# Altium PCB imx6_base_board_lcd7_r1.PcbDoc (part 5 of 6)
Units mil, origin at the board's own origin, x right, y up, seen from the top; angles counter-clockwise.
Board outline 7480.32 x 5118.11 mil, 4 copper layers (Top Layer, Internal Plane 1, Internal Plane 2, Bottom Layer), stack 30.635 mil thick; 518 components, 398 nets, 1886 pads, 1407 vias.
Unrouted connection lines stored in the file: 12.
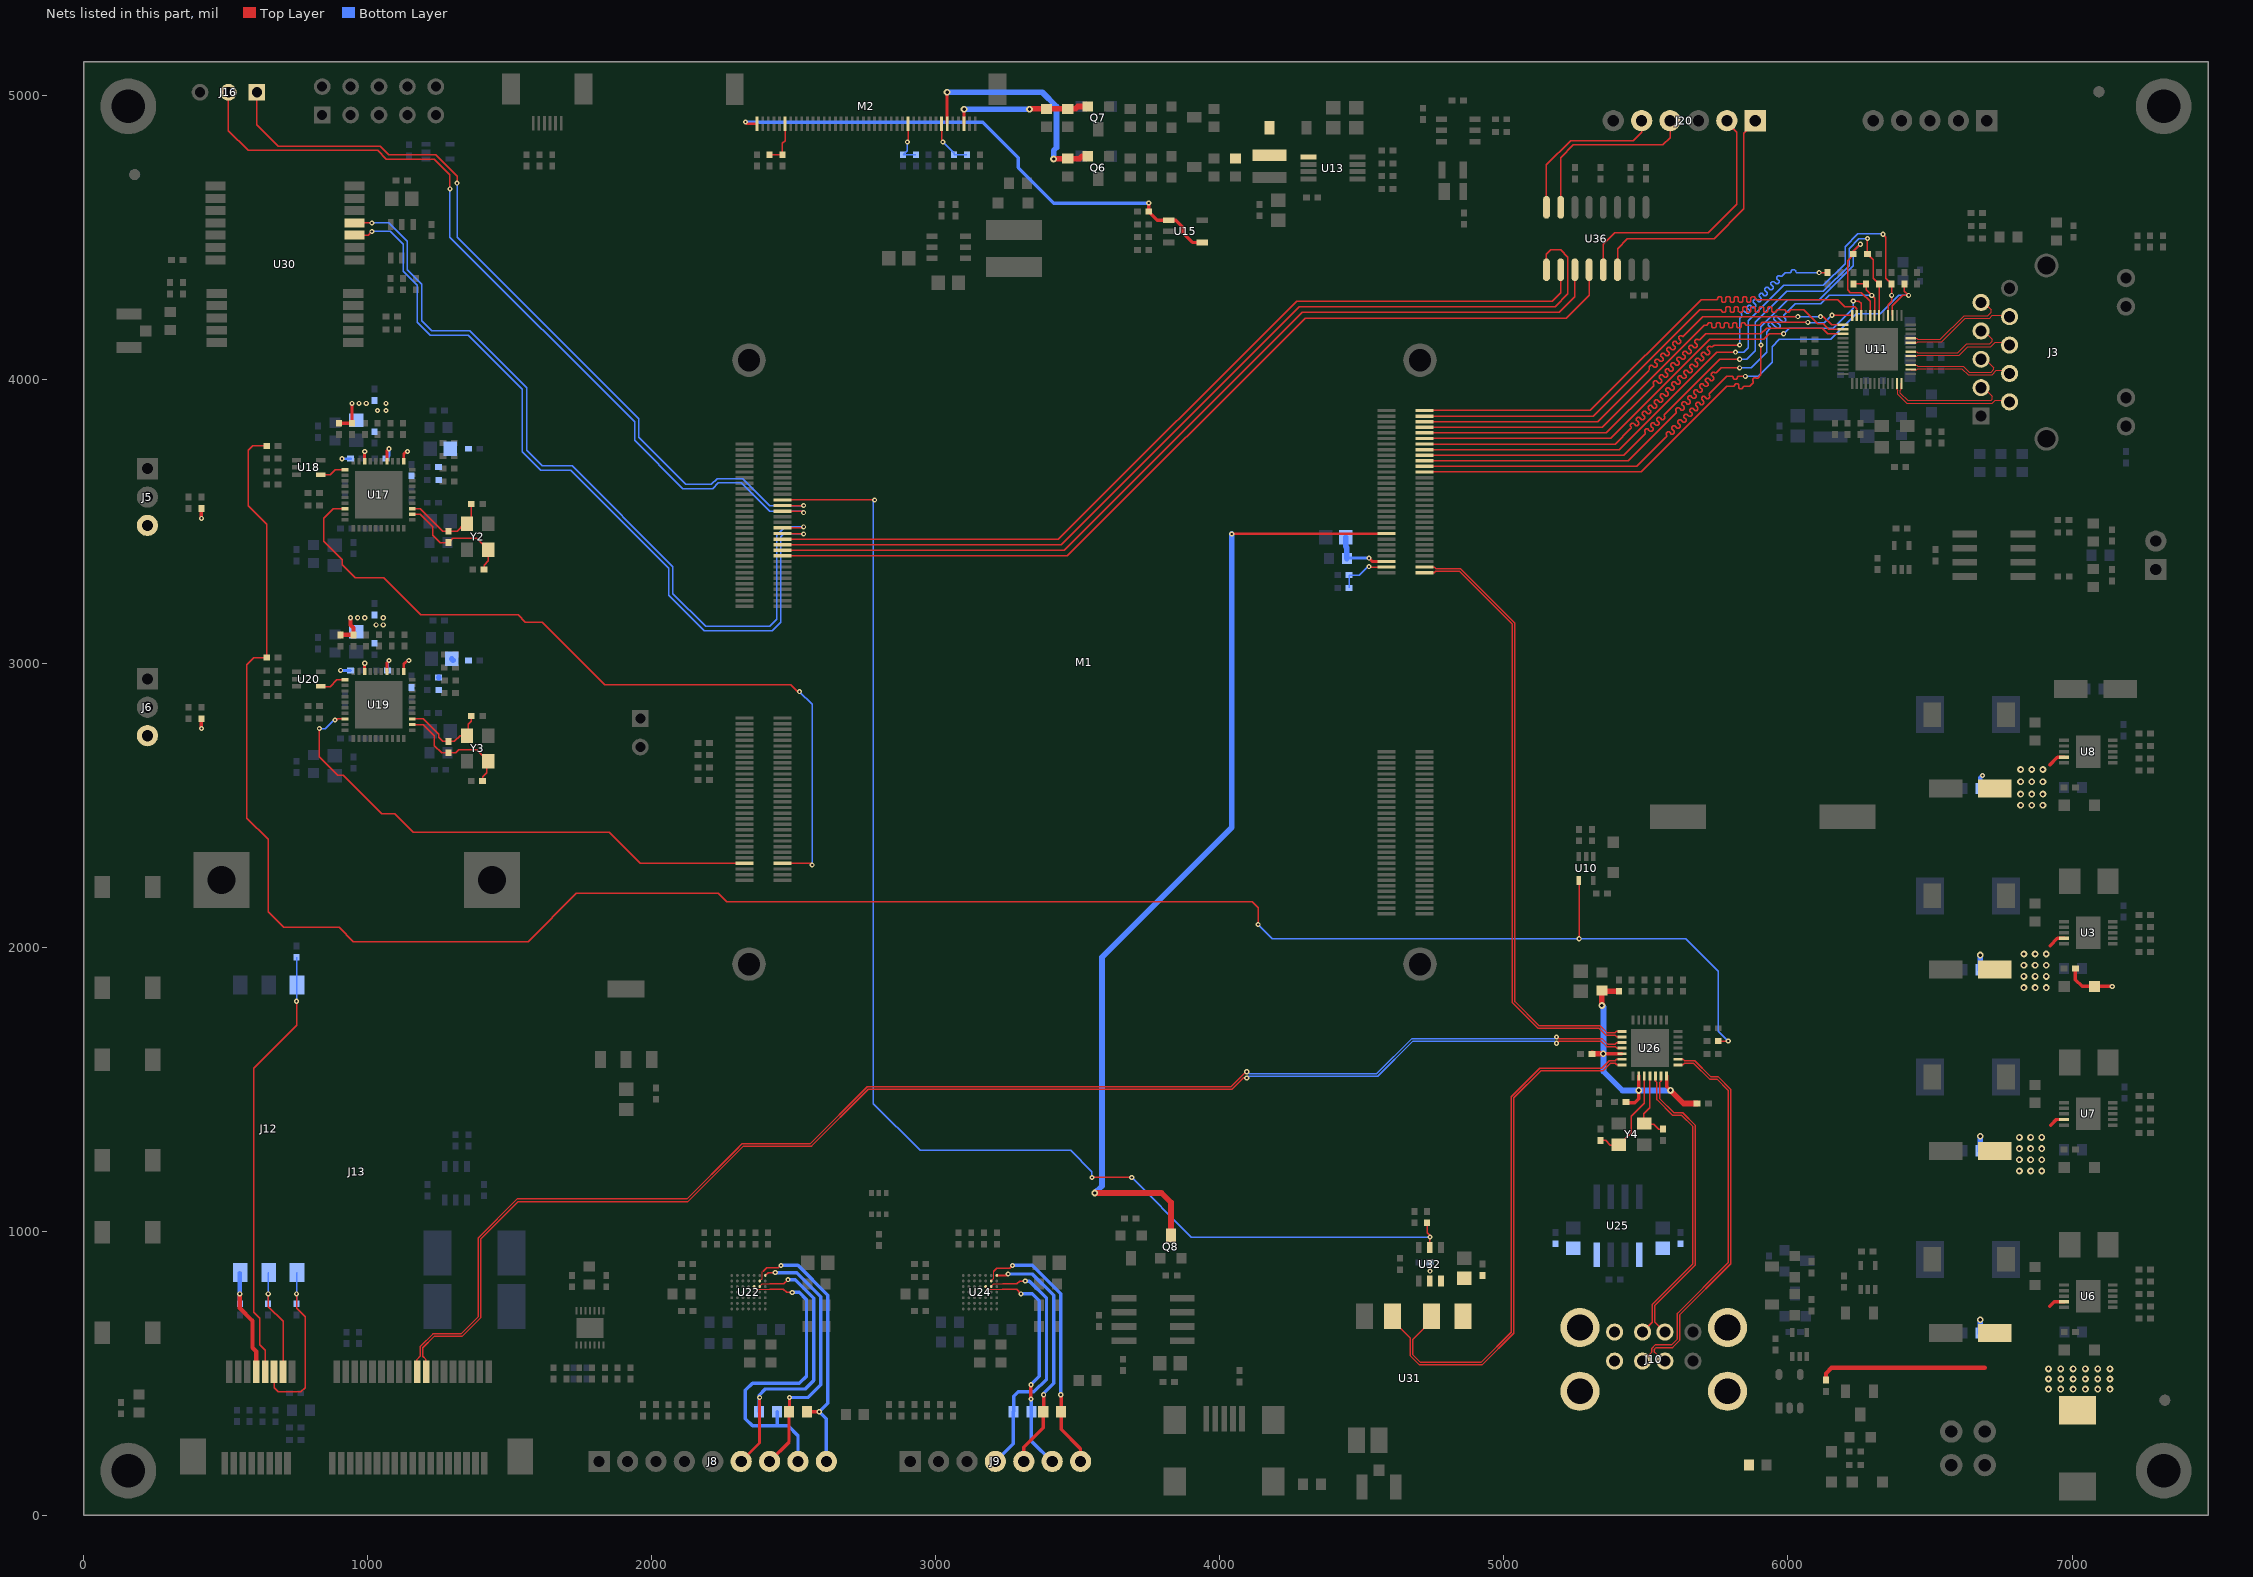
[diagram p7: the nets of this part, all layers, seen from the top]

## Via types
v1: diameter 18, hole 8, Top Layer to Bottom Layer, tented both sides, 875 vias
v2: diameter 24, hole 12, Top Layer to Bottom Layer, tented both sides, 532 vias

## Nets (pads, with @x,y where several pads share a name; then routed paths per layer and width w, separated by ;. In a path a pad name is that pad's centre, name@x,y a point inside that pad or via, vN(x,y) a via of type N, cw(c..) or ccw(c..) an arc to the next point about the centre after c; other vN are vias at no path point) (continued)
RGMII-RXCLK: M1.C14 R34.1 | length 2353.9
  Top Layer w4.7: M1.C14@4720.47,3771.65 5391.65,3771.65 5445,3825 5447.6,3827.6 5447.6,3832.8 5445.72,3834.67 5445.72,3839.87 5450.92,3845.06 5456.12,3845.06 5460.59,3840.59 5465.06,3836.12 5470.26,3836.12 5475.46,3841.32 5475.46,3846.51 5470.99,3850.99 5466.51,3855.46 5466.51,3860.66 5471.71,3865.85 5476.91,3865.85 5481.38,3861.38 5485.85,3856.91 5491.05,3856.91 5496.25,3862.11 5496.25,3867.3 5491.78,3871.78 5487.3,3876.25 5487.3,3881.44 5492.5,3886.64 5497.7,3886.64 5502.17,3882.17 5506.64,3877.7 5511.84,3877.7 5517.04,3882.89 5517.04,3888.09 5512.56,3892.56 5508.09,3897.04 5508.09,3902.23 5513.29,3907.43 5518.49,3907.43 5522.96,3902.96 5527.43,3898.49 5532.63,3898.49 5537.83,3903.68 5537.83,3908.88 5533.35,3913.35 5528.88,3917.83 5528.88,3923.02 5534.08,3928.22 5539.28,3928.22 5543.75,3923.75 5548.22,3919.28 5553.42,3919.28 5558.61,3924.47 5558.61,3929.67 5554.14,3934.14 5549.67,3938.61 5549.67,3943.81 5554.87,3949.01 5560.06,3949.01 5564.54,3944.54 5569.01,3940.06 5574.21,3940.06 5579.4,3945.26 5579.4,3950.46 5574.93,3954.93 5570.46,3959.4 5570.46,3964.6 5575.66,3969.8 5580.85,3969.8 5585.33,3965.33 5589.8,3960.85 5595,3960.85 5600.19,3966.05 5600.19,3971.25 5595.72,3975.72 5591.25,3980.19 5591.25,3985.39 5596.44,3990.59 5601.64,3990.59 5606.11,3986.11 5610.59,3981.64 5615.78,3981.64 5620.98,3986.84 5620.98,3992.04 5616.51,3996.51 5612.04,4000.98 5612.04,4006.18 5617.23,4011.38 5622.43,4011.38 5626.9,4006.9 5631.38,4002.43 5636.57,4002.43 5641.77,4007.63 5641.77,4012.83 5637.3,4017.3 5632.83,4021.77 5632.83,4026.97 5638.02,4032.16 5643.22,4032.16 5647.69,4027.69 5652.16,4023.22 5657.36,4023.22 5662.56,4028.42 5662.56,4033.61 5658.09,4038.09 5653.61,4042.56 5653.61,4047.76 5658.81,4052.95 5664.01,4052.95 5668.48,4048.48 5672.95,4044.01 5678.15,4044.01 5683.35,4049.21 5683.35,4054.4 5678.88,4058.88 5674.4,4063.35 5674.4,4068.55 5679.6,4073.74 5684.8,4073.74 5689.27,4069.27 5693.74,4064.8 5698.94,4064.8 5704.14,4069.99 5704.14,4075.19 5699.66,4079.66 5695.19,4084.14 5695.19,4089.33 5700.39,4094.53 5705.59,4094.53 5710.06,4090.06 5714.53,4085.59 5719.73,4085.59 5724.93,4090.78 5724.93,4095.98 5720.45,4100.45 5715.98,4104.93 5715.98,4110.12 5721.18,4115.32 5726.38,4115.32 5728.25,4113.45 5733.45,4113.45 5740,4120 5747.35,4120 5760,4120 v1(5830,4120) ; v1(6110,4375) 6147.2,4375 R34.1@6147.6,4375.4
  Bottom Layer w4.7: v1(5830,4120) 5830,4215 5835,4220 5837.6,4222.6 5837.6,4227.8 5835.97,4229.42 5835.97,4234.62 5841.17,4239.82 5846.37,4239.82 5850.59,4235.59 5854.82,4231.37 5860.01,4231.37 5865.21,4236.56 5865.21,4241.76 5860.99,4245.99 5856.76,4250.21 5856.76,4255.41 5861.96,4260.61 5867.16,4260.61 5871.38,4256.38 5875.61,4252.16 5880.8,4252.16 5886,4257.35 5886,4262.55 5881.78,4266.78 5877.55,4271 5877.55,4276.2 5882.75,4281.39 5887.94,4281.39 5892.17,4277.17 5896.39,4272.94 5901.59,4272.94 5906.79,4278.14 5906.79,4283.34 5902.56,4287.56 5898.34,4291.79 5898.34,4296.99 5903.54,4302.18 5908.73,4302.18 5912.96,4297.96 5917.18,4293.73 5922.38,4293.73 5927.58,4298.93 5927.58,4304.13 5923.35,4308.35 5919.13,4312.58 5919.13,4317.78 5924.33,4322.97 5929.52,4322.97 5933.75,4318.75 5937.97,4314.52 5943.17,4314.52 5948.37,4319.72 5948.37,4324.92 5944.14,4329.14 5939.92,4333.37 5939.92,4338.56 5945.11,4343.76 5950.31,4343.76 5954.54,4339.54 5958.76,4335.31 5963.96,4335.31 5969.16,4340.51 5969.16,4345.71 5964.93,4349.93 5960.71,4354.16 5960.71,4359.35 5965.9,4364.55 5971.1,4364.55 5972.73,4362.92 5977.92,4362.92 5990,4375 5997.35,4375 6008.38,4375 6012.05,4378.68 6012.05,4380.98 6015.73,4384.65 6023.08,4384.65 6026.75,4380.98 6026.75,4378.25 6030,4375 v1(6110,4375)
RGMII-RXD0: M1.C20 R47.1 R51.2 U11.31 | length 2353.9
  Top Layer w4.7: M1.C20@4720.47,3712.6 5437.6,3712.6 5605,3880 5607.6,3882.6 5607.6,3887.8 5605.72,3889.67 5605.72,3894.87 5610.92,3900.06 5616.12,3900.06 5620.59,3895.59 5625.06,3891.12 5630.26,3891.12 5635.46,3896.32 5635.46,3901.51 5630.99,3905.99 5626.51,3910.46 5626.51,3915.66 5631.71,3920.85 5636.91,3920.85 5641.38,3916.38 5645.85,3911.91 5651.05,3911.91 5656.25,3917.11 5656.25,3922.3 5651.78,3926.78 5647.3,3931.25 5647.3,3936.44 5652.5,3941.64 5657.7,3941.64 5662.17,3937.17 5666.64,3932.7 5671.84,3932.7 5677.04,3937.89 5677.04,3943.09 5672.56,3947.56 5668.09,3952.04 5668.09,3957.23 5673.29,3962.43 5678.49,3962.43 5682.96,3957.96 5687.43,3953.49 5692.63,3953.49 5697.83,3958.68 5697.83,3963.88 5693.35,3968.35 5688.88,3972.83 5688.88,3978.02 5694.08,3983.22 5699.27,3983.22 5703.75,3978.75 5708.22,3974.27 5713.42,3974.27 5718.61,3979.47 5718.61,3984.67 5714.14,3989.14 5709.67,3993.61 5709.67,3998.81 5714.87,4004.01 5720.06,4004.01 5724.54,3999.54 5729.01,3995.06 5734.21,3995.06 5739.4,4000.26 5739.4,4005.46 5734.93,4009.93 5730.46,4014.4 5730.46,4019.6 5735.66,4024.8 5740.85,4024.8 5742.73,4022.92 5747.92,4022.92 5755,4030 5765,4040 v1(5830,4040) ; R51.2@6230,4335.13 6274.75,4335.13 R47.1@6275,4334.87 6275,4315 v1(6295,4295) 6305.08,4284.92 U11.31@6305.08,4224.38
  Bottom Layer w4.7: v1(5830,4040) 5870,4040 5925,4095 5925,4165 5935,4175 5937.6,4177.6 5937.6,4182.8 5929.96,4190.43 5929.96,4195.63 5935.16,4200.82 5940.36,4200.82 5950.59,4190.59 5961.83,4179.36 5967.02,4179.36 5972.22,4184.56 5972.22,4189.75 5960.99,4200.99 5950.75,4211.22 5950.75,4216.42 5955.95,4221.61 5961.15,4221.61 5971.38,4211.38 5982.61,4200.15 5987.81,4200.15 5993.01,4205.34 5993.01,4210.54 5984.37,4219.18 5984.37,4224.37 5997.5,4237.5 6025,4265 6115,4265 6145,4295 v1(6295,4295)
RGMII-RXD1: M1.C18 R48.1 R52.2 U11.30 | length 2353.9
  Top Layer w4.7: M1.C18@4720.47,3732.28 5422.28,3732.28 5495,3805 5497.6,3807.6 5497.6,3812.8 5495.86,3814.53 5495.86,3819.73 5501.06,3824.93 5506.26,3824.93 5510.59,3820.59 5514.93,3816.26 5520.12,3816.26 5525.32,3821.45 5525.32,3826.65 5520.99,3830.99 5516.65,3835.32 5516.65,3840.52 5521.85,3845.72 5527.05,3845.72 5531.38,3841.38 5535.72,3837.05 5540.91,3837.05 5546.11,3842.24 5546.11,3847.44 5541.78,3851.78 5537.44,3856.11 5537.44,3861.31 5542.64,3866.5 5547.83,3866.5 5552.17,3862.17 5556.5,3857.83 5561.7,3857.83 5566.9,3863.03 5566.9,3868.23 5565,3870.13 5565,3875 5760,4070 v1(5830,4070) ; v1(6280,4495) 6279.87,4494.87 R48.1@6279.87,4440 6300,4419.87 6300,4355 6300.13,4355 R52.2@6320,4335.13 ; U11.30@6320.82,4224.38 6320.82,4285.82 ; 6320.83,4295 6320.83,4285.83 ; 6320.82,4304.99 6320.82,4285.82 ; 6320.83,4305 R52.2@6320.83,4335.59
  Bottom Layer w4.7: v1(5830,4070) 5855,4070 5885,4100 5885,4200 5995,4310 6125,4310 6215,4400 6215,4460 6250,4495 v1(6280,4495)
RGMII-RXD2: M1.C16 R53.2 U11.28 | length 2324.6
  Top Layer w4.7: M1.C16@4720.47,3751.97 5406.97,3751.97 5750,4095 v1(5815,4095) ; v1(6335,4510) 6345,4500 6345,4355 6364.87,4335.13 R53.2@6365,4335.13 ; U11.28@6352.32,4224.38 6352.32,4262.32 6365,4275 v1(6365,4295) 6365,4334.72 R53.2@6364.13,4335.59
  Bottom Layer w4.7: v1(5815,4095) 5845,4095 5860,4110 5860,4205 5985,4330 6125,4330 6201.35,4406.35 6201.35,4466.35 6246.35,4511.35 6333.65,4511.35 v1(6335,4510)
RGMII-RXD3: M1.C22 R54.2 U11.27 | length 2353.9
  Top Layer w4.7: M1.C22@4720.47,3692.91 5467.91,3692.91 5570,3795 5572.6,3797.6 5572.6,3802.8 5571,3804.4 5571,3809.59 5576.2,3814.79 5581.39,3814.79 5585.59,3810.59 5589.79,3806.39 5594.99,3806.39 5600.19,3811.59 5600.19,3816.79 5595.99,3820.99 5591.79,3825.19 5591.79,3830.38 5596.98,3835.58 5602.18,3835.58 5606.38,3831.38 5610.58,3827.18 5615.78,3827.18 5620.97,3832.38 5620.97,3837.58 5616.78,3841.78 5612.58,3845.97 5612.58,3851.17 5617.77,3856.37 5622.97,3856.37 5627.17,3852.17 5631.37,3847.97 5636.57,3847.97 5641.76,3853.17 5641.76,3858.36 5637.56,3862.56 5633.36,3866.76 5633.36,3871.96 5638.56,3877.16 5643.76,3877.16 5647.96,3872.96 5652.16,3868.76 5657.36,3868.76 5662.55,3873.96 5662.55,3879.15 5658.35,3883.35 5654.15,3887.55 5654.15,3892.75 5659.35,3897.95 5664.55,3897.95 5668.75,3893.75 5672.95,3889.55 5678.14,3889.55 5683.34,3894.75 5683.34,3899.94 5679.14,3904.14 5674.94,3908.34 5674.94,3913.54 5680.14,3918.74 5685.34,3918.74 5689.54,3914.54 5693.74,3910.34 5698.93,3910.34 5704.13,3915.53 5704.13,3920.73 5699.93,3924.93 5695.73,3929.13 5695.73,3934.33 5700.93,3939.52 5706.13,3939.52 5710.33,3935.33 5714.52,3931.13 5719.72,3931.13 5724.92,3936.32 5724.92,3941.52 5723.32,3943.12 5723.32,3948.32 5785,4010 5792.35,4010 5803.38,4010 5807.05,4006.32 5807.05,4004.06 5810.73,4000.39 5818.08,4000.39 5821.75,4004.06 5821.75,4006.75 5825,4010 v1(5850,4010) ; U11.27@6368.07,4224.38 6368.07,4258.07 6405,4295 v1(6425,4295) 6410,4310 R54.2@6410,4335.13
  Bottom Layer w4.7: v1(5850,4010) 5895,4010 5945,4060 5945,4115 5970,4140 6150,4140 6240,4230 6325,4230 6390,4295 v1(6425,4295)
RGMII-RXDV: M1.C24 R56.2 U11.32 | length 2353.9
  Top Layer w4.7: M1.C24@4720.47,3673.23 5483.23,3673.23 5785,3975 5805,3975 5808.67,3975 5812.35,3978.68 5812.35,3980.81 5816.02,3984.48 5823.38,3984.48 5827.05,3980.81 5827.05,3975 5827.05,3969.19 5830.73,3965.52 5838.08,3965.52 5841.75,3969.19 5841.75,3971.32 5845.42,3975 5856.45,3975 5865,3975 5870.2,3980.2 5877.99,3987.99 5877.99,3993.19 5876.49,3994.7 5876.49,3999.89 5881.68,4005.09 5886.88,4005.09 5888.39,4003.58 5893.58,4003.58 5905,4015 5905,4060 5905,4100 v1(5905,4120) ; R56.2@6229.87,4440 6229.87,4449.87 v1(6255,4475) ; R56.2@6230.46,4437.95 6210,4417.49 6210,4315 6220,4305 6258.72,4305 6289.33,4274.39 U11.32@6289.33,4224.38
  Bottom Layer w4.7: v1(5905,4120) 5905,4185 6000,4280 6110,4280 6230,4400 6230,4450 v1(6255,4475)
RGMII-TRX0_N: J3.3 U11.12 | length 435.2
  Top Layer w3.8: U11.12@6399.56,3985.2 6399.56,3964.3 6396.19,3960.93 6396.19,3950 6421.19,3925 6715,3925 6720,3930 6720,3940 6690,3970 J3.3@6680.09,3970
RGMII-TRX0_P: J3.2 U11.11 | length 452.6
  Top Layer w3.8: U11.11@6383.82,3985.2 6383.82,3964.3 6387.19,3960.93 6387.19,3946.27 6417.46,3916 6718.73,3916 6729,3926.27 6773.82,3926.27 J3.2@6780.09,3920
RGMII-TRX1_N: J3.5 U11.15 | length 369.2
  Top Layer w3.8: U11.15@6432.54,4049.67 6453.44,4049.67 6456.81,4046.29 6616.44,4046.29 6637.73,4025 6715,4025 6725,4035 6725,4040 6695,4070 J3.5@6680.09,4070
RGMII-TRX1_P: J3.4 U11.14 | length 368.8
  Top Layer w3.8: U11.14@6432.54,4033.92 6453.44,4033.92 6456.81,4037.29 6612.71,4037.29 6634,4016 6718.73,4016 6734,4031.27 6768.82,4031.27 J3.4@6780.09,4020
RGMII-TRX2_N: J3.7 U11.18 | length 364
  Top Layer w3.8: U11.18@6432.54,4096.92 6453.44,4096.92 6456.81,4093.54 6598.54,4093.54 6629,4124 6710,4124 6720,4134 6720,4140 6690,4170 J3.7@6680.09,4170
RGMII-TRX2_P: J3.6 U11.17 | length 372.1
  Top Layer w3.8: U11.17@6432.54,4081.17 6453.44,4081.17 6456.81,4084.54 6602.27,4084.54 6632.73,4115 6713.73,4115 6729,4130.27 6769.82,4130.27 J3.6@6780.09,4120
RGMII-TRX3_N: J3.9 U11.21 | length 383.2
  Top Layer w3.8: U11.21@6432.54,4144.16 6453.44,4144.16 6456.81,4140.78 6537.05,4140.78 6620.27,4224 6704,4224 6715,4235 6715,4245 6690,4270 J3.9@6680.09,4270 J3.9@6680.09,4264.91
RGMII-TRX3_P: J3.8 U11.20 | length 396.7
  Top Layer w3.8: U11.20@6432.54,4128.41 6453.44,4128.41 6456.81,4131.78 6540.78,4131.78 6624,4215 6710,4215 6720,4225 6775.09,4225 J3.8@6780.09,4220 J3.8@6775.09,4215
RGMII-TXCLK: M1.C2 U11.35 | length 1856.8
  Top Layer w4.7: M1.C2@4720.47,3889.76 5304.76,3889.76 5695,4280 5745,4280 5748.67,4280 5752.35,4283.68 5752.35,4286.32 5756.02,4289.99 5763.38,4289.99 5767.05,4286.32 5767.05,4280 5767.05,4273.68 5770.73,4270.01 5778.08,4270.01 5781.75,4273.68 5781.75,4280 5781.75,4286.32 5785.42,4289.99 5792.77,4289.99 5796.45,4286.32 5796.45,4280 5796.45,4273.68 5800.12,4270.01 5807.48,4270.01 5811.15,4273.68 5811.15,4280 5811.15,4286.32 5814.83,4289.99 5822.17,4289.99 5825.85,4286.32 5825.85,4280 5825.85,4273.68 5829.52,4270.01 5836.88,4270.01 5840.55,4273.68 5840.55,4280 5840.55,4286.32 5844.23,4289.99 5851.58,4289.99 5855.25,4286.32 5855.25,4280 5855.25,4273.68 5858.92,4270.01 5866.27,4270.01 5869.95,4273.68 5869.95,4280 5869.95,4286.32 5873.62,4289.99 5880.98,4289.99 5884.65,4286.32 5884.65,4283.68 5888.33,4280 5940,4280 6175,4280 6200,4255 6235,4255 6242.08,4247.92 U11.35@6242.08,4224.38
RGMII-TXD0: M1.C8 U11.36 | length 1798.4
  Top Layer w4.7: M1.C8@4720.47,3830.71 5345.71,3830.71 5705,4190 5710,4190 5713.67,4190 5717.35,4193.68 5717.35,4195.82 5721.02,4199.49 5728.38,4199.49 5732.05,4195.82 5732.05,4190 5732.05,4184.18 5735.73,4180.51 5743.08,4180.51 5746.75,4184.18 5746.75,4190 5746.75,4195.82 5750.42,4199.49 5757.77,4199.49 5761.45,4195.82 5761.45,4190 5761.45,4184.18 5765.12,4180.51 5772.48,4180.51 5776.15,4184.18 5776.15,4190 5776.15,4195.82 5779.83,4199.49 5787.17,4199.49 5790.85,4195.82 5790.85,4190 5790.85,4184.18 5794.52,4180.51 5801.88,4180.51 5805.55,4184.18 5805.55,4190 5805.55,4195.82 5809.23,4199.49 5816.58,4199.49 5820.25,4195.82 5820.25,4190 5820.25,4184.18 5823.92,4180.51 5831.27,4180.51 5834.95,4184.18 5834.95,4190 5834.95,4195.82 5838.62,4199.49 5845.98,4199.49 5849.65,4195.82 5849.65,4193.68 5853.33,4190 5865,4190 5900,4190 5910,4200 v1(6070,4200) ; v1(6155,4225) 6155.62,4224.38 U11.36@6226.34,4224.38
  Bottom Layer w4.7: v1(6070,4200) 6071.35,4198.65 6128.65,4198.65 v1(6155,4225)
RGMII-TXD1: M1.C6 U11.37 | length 1798.4
  Top Layer w4.7: M1.C6@4720.47,3850.39 5330.39,3850.39 5510,4030 5512.6,4032.6 5512.6,4037.8 5511.03,4039.36 5511.03,4044.56 5516.23,4049.76 5521.43,4049.76 5525.59,4045.59 5529.76,4041.43 5534.95,4041.43 5540.15,4046.62 5540.15,4051.82 5535.99,4055.99 5531.82,4060.15 5531.82,4065.35 5537.02,4070.55 5542.22,4070.55 5546.38,4066.38 5550.55,4062.22 5555.74,4062.22 5560.94,4067.41 5560.94,4072.61 5556.78,4076.78 5552.61,4080.94 5552.61,4086.14 5557.81,4091.33 5563,4091.33 5567.17,4087.17 5571.33,4083 5576.53,4083 5581.73,4088.2 5581.73,4093.4 5577.56,4097.56 5573.4,4101.73 5573.4,4106.93 5578.6,4112.12 5583.79,4112.12 5587.96,4107.96 5592.12,4103.79 5597.32,4103.79 5602.52,4108.99 5602.52,4114.19 5598.35,4118.35 5594.19,4122.52 5594.19,4127.72 5599.38,4132.91 5604.58,4132.91 5608.75,4128.75 5612.91,4124.58 5618.11,4124.58 5623.31,4129.78 5623.31,4134.98 5619.14,4139.14 5614.98,4143.31 5614.98,4148.5 5620.17,4153.7 5625.37,4153.7 5629.07,4150 5630,4150 5700,4220 v1(6035,4220) ; v1(6115,4220) 6125,4220 6153.6,4191.4 U11.37@6193.36,4191.4
  Bottom Layer w4.7: v1(6035,4220) v1(6115,4220)
RGMII-TXD2: M1.C4 U11.38 | length 1856.8
  Top Layer w4.7: M1.C4@4720.47,3870.08 5315.08,3870.08 5690,4245 5725,4245 5745,4245 5752.35,4245 5763.38,4245 5767.05,4241.32 5767.05,4239.07 5770.73,4235.4 5778.08,4235.4 5781.75,4239.07 5781.75,4245 5781.75,4250.93 5785.42,4254.6 5792.77,4254.6 5796.45,4250.93 5796.45,4245 5796.45,4239.07 5800.12,4235.4 5807.48,4235.4 5811.15,4239.07 5811.15,4245 5811.15,4250.93 5814.83,4254.6 5822.17,4254.6 5825.85,4250.93 5825.85,4245 5825.85,4239.07 5829.52,4235.4 5836.88,4235.4 5840.55,4239.07 5840.55,4245 5840.55,4250.93 5844.23,4254.6 5851.58,4254.6 5855.25,4250.93 5855.25,4245 5855.25,4239.07 5858.92,4235.4 5866.27,4235.4 5869.95,4239.07 5869.95,4245 5869.95,4250.93 5873.62,4254.6 5880.98,4254.6 5884.65,4250.93 5884.65,4245 5884.65,4239.07 5888.33,4235.4 5895.67,4235.4 5899.35,4239.07 5899.35,4245 5899.35,4250.93 5903.02,4254.6 5910.38,4254.6 5914.05,4250.93 5914.05,4245 5914.05,4239.07 5917.73,4235.4 5925.08,4235.4 5928.75,4239.07 5928.75,4245 5928.75,4250.93 5932.42,4254.6 5939.77,4254.6 5943.45,4250.93 5943.45,4245 5943.45,4239.07 5947.12,4235.4 5954.48,4235.4 5958.15,4239.07 5958.15,4241.32 5961.83,4245 5970,4245 5977.35,4245 5988.38,4245 5992.05,4241.32 5992.05,4239.07 5995.73,4235.4 6003.08,4235.4 6006.75,4239.07 6006.75,4241.32 6010.42,4245 6015,4245 6020,4245 6055,4245 6105,4195 6125,4195 6144.34,4175.66 U11.38@6193.36,4175.66
RGMII-TXD3: M1.C10 U11.39 | length 1856.8
  Top Layer w4.7: M1.C10@4720.47,3811.02 5361.02,3811.02 5525,3975 5527.6,3977.6 5527.6,3982.8 5525.92,3984.47 5525.92,3989.67 5531.12,3994.87 5536.32,3994.87 5540.59,3990.59 5544.87,3986.32 5550.07,3986.32 5555.26,3991.51 5555.26,3996.71 5550.99,4000.99 5546.71,4005.26 5546.71,4010.46 5551.91,4015.66 5557.1,4015.66 5561.38,4011.38 5565.66,4007.1 5570.85,4007.1 5576.05,4012.3 5576.05,4017.5 5571.78,4021.78 5567.5,4026.05 5567.5,4031.25 5572.7,4036.45 5577.89,4036.45 5582.17,4032.17 5586.45,4027.89 5591.64,4027.89 5596.84,4033.09 5596.84,4038.29 5592.56,4042.56 5588.29,4046.84 5588.29,4052.04 5593.48,4057.24 5598.68,4057.24 5602.96,4052.96 5607.24,4048.68 5612.43,4048.68 5617.63,4053.88 5617.63,4059.08 5613.35,4063.35 5609.08,4067.63 5609.08,4072.83 5614.27,4078.02 5619.47,4078.02 5623.75,4073.75 5628.02,4069.47 5633.22,4069.47 5638.42,4074.67 5638.42,4079.87 5634.14,4084.14 5629.87,4088.42 5629.87,4093.62 5635.06,4098.81 5640.26,4098.81 5644.54,4094.54 5648.81,4090.26 5654.01,4090.26 5659.21,4095.46 5659.21,4100.65 5654.93,4104.93 5650.65,4109.21 5650.65,4114.4 5655.85,4119.6 5661.05,4119.6 5665.33,4115.33 5669.6,4111.05 5674.8,4111.05 5680,4116.25 5680,4121.44 5675.72,4125.72 5671.44,4130 5671.44,4135.19 5676.64,4140.39 5681.84,4140.39 5683.52,4138.71 5688.71,4138.71 5705,4155 5710,4160 5905,4160 5925,4180 6120,4180 6140.09,4159.91 U11.39@6193.36,4159.91
RGMII-TXEN: M1.C12 U11.34 | length 1798.4
  Top Layer w4.7: M1.C12@4720.47,3791.34 5376.34,3791.34 5725,4140 5915,4140 5935,4160 v1(5985,4160) ; v1(6230,4275) 6250,4275 6257.83,4267.17 U11.34@6257.83,4224.38
  Bottom Layer w4.7: v1(5985,4160) 6005,4180 6160,4180 6230,4250 v1(6230,4275)
RS232-RX-1: J20.2 U36.13 | length 927.5
  Top Layer w4.7: U36.13@5350,4385 5350,4475 5390,4515 5720,4515 5820,4615 5820,4870 5785,4905 J20.2@5785,4910
RS232-RX-2: J20.5 U36.8 | length 572.6
  Top Layer w4.7: U36.8@5150,4605 5150,4755 5235,4840 5455,4840 5485,4870 J20.5@5485,4910
RS232-TX-1: J20.1 U36.14 | length 904.6
  Top Layer w4.7: U36.14@5400,4385 5400,4460 5435,4495 5740,4495 5845,4600 5845,4865 5885,4905 J20.1@5885,4910
RS232-TX-2: J20.4 U36.7 | length 649
  Top Layer w4.7: U36.7@5200,4605 5200,4780 5245,4825 5560,4825 5585,4850 J20.4@5585,4910
SELB: M2.28 R75.2 R76.2 | length 161.8
  Top Layer w4.7: v1(2900,4835) 2902.64,4837.64 M2.28@2902.64,4899.37
  Bottom Layer w4.7: v1(2900,4835) 2900,4804.87 R76.2@2885,4789.87 R75.2@2930,4789.87
SIMCLK: C180.1 J12.3 J13.12 | length 631.4
  Top Layer w4.7: J13.12@670.79,506.42 670.79,449.21 685,435 765,435 780,450 780,700 750,730 v1(750,780)
  Bottom Layer w4.7: C180.1@750,745.13 v1(750,780) 750,853.54 J12.3@751.46,855
SIMDATA: C179.1 J12.6 J13.10 | length 1536.9
  Top Layer w4.7: J13.10@639.29,506.42 639.29,580.71 620,600 620,695 600,715 600,1575 750,1725 v1(750,1810)
  Bottom Layer w4.7: v1(750,1810) C179.1@750,1964.87
SIMRST: C182.1 J12.2 J13.14 | length 405.7
  Top Layer w4.7: v1(650,780) 650,735 702.28,682.72 J13.14@702.28,506.42
  Bottom Layer w4.7: C182.1@650,745.13 v1(650,780) 650,853.54 J12.2@651.46,855
SIMVCC: C181.1 J12.1 J13.8 | length 415.6
  Top Layer w15: v1(550,780) 550,730 595,685 595,590 607.8,577.2 J13.8@607.8,506.42
  Bottom Layer w4.7: C181.1@550,747.28 552.16,745.13 552.16,747.84 C181.1@555,745 ; J12.1@550,853.54 J12.1@551.46,855
  Bottom Layer w15: C181.1@550,747.28 v1(550,780) J12.1@550,853.54
SPKOUTLN1: J8.6 R124.2 U22.B3 | length 1031.9
  Top Layer w3: U22.B3@2380.63,805.63 U22.B3@2380.31,805.63 2389.81,815.13 2414.87,815.13 2415,815
  Top Layer w4.7: 2415,815 2465,815 v1(2480,830)
  Top Layer w10: J8.6@2315,190 2380,255 v1(2380,415)
  Bottom Layer w12: R124.2@2378.5,365 v1@2378.5,415 ; v1@2378.5,423.5 2400,445 2540,445 2570,475 2570,765 2505,830 v1(2480,830)
SPKOUTLN2: J9.4 R135.2 U24.B3 | length 910.6
  Top Layer w3: U24.B3@3195.31,805.63 3195.63,805.63 3205,815 3235,815
  Top Layer w4.7: 3235,815 3285,815 3295,825 v1(3315,825)
  Bottom Layer w12: J9.4@3209.45,188.98 3273.5,253.03 R135.2@3273.5,365 3275,366.5 3275,420 3290,435 3345,435 3390,480 3390,765 3330,825 v1(3315,825)
SPKOUTLP1: J8.7 R125.2 U22.A1 | length 927
  Top Layer w4.7: U22.A1@2400,845 2410,855 v1(2435,855)
  Top Layer w12: J8.7@2415,190 2483.5,258.5 R125.2@2483.5,365 2485,366.5 v1(2485,415)
  Bottom Layer w12: v1(2435,855) 2510,855 2595,770 2595,460 2550,415 v1(2485,415)
SPKOUTLP2: J9.5 R136.2 U24.A1 | length 862.9
  Top Layer w8: U24.A1@3215,845 3250,845 v1(3255,850)
  Top Layer w12: J9.5@3309.45,188.98 3309.45,239.45 3378.5,308.5 R136.2@3378.5,365 3380,366.5 v1(3380,425)
  Bottom Layer w12: v1(3255,850) 3340,850 3415,775 3415,465 3380,430 v1(3380,425)
SPKOUTRN1: J8.8 R124.1 U22.C3 | length 1159.5
  Top Layer w3: U22.C3@2360.63,805.63 2370.26,796 2415,796
  Top Layer w4.7: 2415,796 2464,796 2475,785 v1(2495,785)
  Bottom Layer w12: R124.1@2441.5,365 2441.5,316.5 2440,315 ; v1(2495,785) 2520,785 2545,760 2545,490 2520,465 2355,465 2330,440 2330,340 2355,315 2440,315 ; J8.8@2515,190 2515,280 2480,315 2440,315
SPKOUTRN2: J9.6 R135.1 U24.C3 | length 819.6
  Top Layer w3: U24.C3@3175.63,805.63 3185.82,795.44 3234.56,795.44
  Top Layer w4.7: 3234.56,795.44 3284.56,795.44 v1(3300,780)
  Top Layer w12: v1(3335,410) v1(3335,460)
  Bottom Layer w12: v1(3300,780) 3340,780 3365,755 3365,490 v1(3335,460) ; v1(3335,410) 3336.5,408.5 R135.1@3336.5,365 3336.5,261.93 J9.6@3409.45,188.98
SPKOUTRP1: J8.9 R125.1 U22.B2 | length 977.7
  Top Layer w3: U22.B2@2380.31,825.31 2381.31,825.31 2390,834 2390,857 2392,859
  Top Layer w4.7: 2392,859 2404.35,871.35 2446.35,871.35 v1(2455,880)
  Top Layer w12: R125.1@2546.5,365 v1(2590,365)
  Bottom Layer w12: v1(2455,880) 2515,880 2620,775 2620,395 v1(2590,365) 2615,340 J8.9@2615,190 J8.9@2620,195
SPKOUTRP2: J9.7 R136.1 U24.B2 | length 943.2
  Top Layer w3: U24.B2@3195.31,825.31 3205,835 3205,860
  Top Layer w4.7: 3205,860 3215,870 3260,870 v1(3270,880)
  Top Layer w12: v1(3440,425) 3441.5,423.5 R136.1@3441.5,365 3441.5,303.5 3509.45,235.55 J9.7@3509.45,188.98
  Bottom Layer w12: v1(3270,880) 3340,880 3440,780 v1(3440,425)
STBYB: M2.6 R73.2 R74.2 | length 158.5
  Top Layer w4.7: R73.2@2415,4789.87 R74.2@2460,4789.87 2460,4830 2469.57,4839.57 M2.6@2469.57,4899.37
SW: D18.2 L8.2 R63.2 U13.5
SYS-RESET: R95.1 R108.1 R146.2 U10.4 | length 7677.3
  Top Layer w4.7: R95.1@644.87,3765 595,3765 580,3750 580,3555 644.87,3490.13 R108.1@644.87,3020 600,3020 575,2995 575,2455 650,2380 650,2125 705,2070 900,2070 950,2020 1565,2020 1735,2190 2235,2190 2265,2160 4115,2160 4135,2140 v1(4135,2080) ; U10.4@5263.8,2235 5265,2233.8 v1(5265,2030) ; R146.2@5754.87,1670 v1(5790,1670)
  Bottom Layer w4.7: v1(4135,2080) 4185,2030 v1(5265,2030) 5640,2030 5755,1915 5755,1705 v1(5790,1670)
UART1-RXD: J16.2 M1.A26 | length 2980.2
  Top Layer w4.7: J16.2@510,5010 510,4875 580,4805 1035,4805 1065,4775 1235,4775 1290,4720 v1(1290,4670) ; M1.A26@2460.63,3535.43 2529.57,3535.43 v1(2535,3530)
  Bottom Layer w4.7: v1(1290,4670) 1290,4500 1940,3850 1940,3785 2110,3615 2215,3615 2235,3635 2315,3635 2415,3535 2535,3535 v1(2535,3530)
UART1-TXD: J16.1 M1.A24 | length 2850.1
  Top Layer w4.7: J16.1@610,5010 610,4895 685,4820 1045,4820 1075,4790 1240,4790 1315,4715 v1(1315,4690) ; M1.A24@2460.63,3555.12 2460.75,3555 v1(2535,3555)
  Bottom Layer w4.7: v1(1315,4690) 1315,4500 1955,3860 1955,3795 2120,3630 2210,3630 2230,3650 2320,3650 2415,3555 v1(2535,3555)
UART3-RXD: M1.A34 U30.20 | length 2877.2
  Top Layer w4.7: U30.20@953.19,4506.77 1001.77,4506.77 v1(1015,4520) ; M1.A34@2460.63,3456.69 2533.31,3456.69 v1(2535,3455)
  Bottom Layer w4.7: v1(1015,4520) 1080,4520 1125,4475 1125,4380 1175,4330 1175,4200 1220,4155 1355,4155 1545,3965 1545,3745 1610,3680 1715,3680 2060,3335 2060,3240 2185,3115 2425,3115 2455,3145 2455,3445 2465,3455 v1(2535,3455)
UART3-TXD: M1.A32 U30.21 | length 2887.9
  Top Layer w4.7: U30.21@953.19,4550.08 1014.92,4550.08 v1(1015,4550) ; M1.A32@2460.63,3476.38 2531.38,3476.38 v1(2535,3480)
  Bottom Layer w4.7: v1(1015,4550) 1075,4550 1140,4485 1140,4385 1190,4335 1190,4205 1225,4170 1360,4170 1560,3970 1560,3750 1615,3695 1720,3695 2075,3340 2075,3245 2190,3130 2415,3130 2440,3155 2440,3450 2470,3480 v1(2535,3480) v1@2535,3475
UART4-RXD: M1.A42 U36.12 | length 3309.2
  Top Layer w4.7: M1.A42@2460.63,3377.95 3462.95,3377.95 4300,4215 5220,4215 5300,4295 U36.12@5300,4385
UART4-TXD: M1.A40 U36.11 | length 3254
  Top Layer w4.7: M1.A40@2460.63,3397.64 3452.64,3397.64 4290,4235 5195,4235 5250,4290 U36.11@5250,4385
UART5-RXD: M1.A38 U36.9 | length 3406.6
  Top Layer w4.7: M1.A38@2460.63,3417.32 3442.32,3417.32 4280,4255 5180,4255 5225,4300 5225,4430 5200,4455 5165,4455 5150,4440 U36.9@5150,4385
UART5-TXD: M1.A36 U36.10 | length 3178.9
  Top Layer w4.7: M1.A36@2460.63,3437.01 3432.01,3437.01 4270,4275 5170,4275 5200,4305 U36.10@5200,4385
UD: M2.34 R79.2 R80.2 | length 176.4
  Top Layer w4.7: M2.34@3020.75,4899.37 3020.75,4835.75 3020,4835 v1(3025,4835)
  Bottom Layer w4.7: v1(3025,4835) 3065,4795 R80.2@3065,4789.87 R79.2@3110,4789.87
UHX1: C175.2 U26.10 Y4.3 | length 358.7
  Top Layer w4.7: C175.2@5334.65,1318.71 C175.2@5340,1318.71 ; C175.2@5340,1320.13 5358.02,1320.13 5375,1303.15 Y4.3@5401.56,1303.15 ; Y4.3@5401.57,1303.15 5405.51,1303.15 5448.82,1346.46 5448.82,1405.51 5494.22,1450.91 U26.10@5494.22,1547.24
UHX2: C174.2 U26.11 Y4.1 | length 253.7
  Top Layer w4.7: U26.11@5513.91,1547.24 5513.91,1435.17 5492.13,1413.39 5492.13,1377.95 5527.05,1377.95 5545.13,1359.87 C174.2@5560,1359.87
USB1_N: J13.36 U26.3 | length 4954.2
  Top Layer w5.3: J13.36@1173.54,506.81 1173.54,548.83 1184.79,560.08 1184.79,593.73 1230.06,639 1329,639 1390,700 1390,977.73 1526.27,1114 2124,1114 2294,1284 2319,1309 2559,1309 2759,1509 4039,1509 4091.7,1561.7 v1(4095,1561.7) ; v1(5185,1683.99) 5191.35,1677.64 5346.71,1677.64 5365,1659.34 5391.74,1659.34 5397.08,1664.69 U26.3@5415.48,1664.69
  Bottom Layer w5.3: v1(4095,1561.7) 4101.35,1555.35 4552.62,1555.35 4674.91,1677.64 5178.65,1677.64 v1(5185,1683.99)
USB1_P: J13.38 U26.4 | length 4934.1
  Top Layer w5.3: J13.38@1205.04,506.81 1205.04,548.83 1193.79,560.08 1193.79,590 1233.79,630 1332.73,630 1399,696.27 1399,974 1530,1105 2127.73,1105 2322.73,1300 2562.73,1300 2762.73,1500 4042.73,1500 4082.73,1540 v1(4095,1540) ; v1(5185,1662.29) 5191.35,1668.64 5342.98,1668.64 5361.27,1650.34 5391.74,1650.34 5397.08,1645 U26.4@5415.48,1645
  Bottom Layer w5.3: v1(4095,1540) 4101.35,1546.35 4556.35,1546.35 4678.64,1668.64 5178.65,1668.64 v1(5185,1662.29)
USB2_N: U26.6 U31.2 | length 1836.3
  Top Layer w5.3: U31.2@4745.16,701.3 4745.16,685.16 4680,620 4680,565 4705,540 4921,540 5026,645 5026,1473.73 5126.27,1574 5344.32,1574 5371.27,1600.95 5391.73,1600.95 5397.08,1606.3 U26.6@5415.48,1606.3
USB2_P: U26.7 U31.3 | length 1850.5
  Top Layer w5.3: U31.3@4607.36,701.3 4607.36,687.64 4671,624 4671,561.27 4701.27,531 4924.73,531 5035,641.27 5035,1470 5130,1565 5348.05,1565 5375,1591.95 5391.73,1591.95 5397.08,1586.61 U26.7@5415.48,1586.61
USB3_N: J10.2 U26.12 | length 1047.9
  Top Layer w5.3: J10.2@5488.19,645.67 5522.5,679.98 5522.5,742.97 5665.35,885.83 5665.35,1368.95 5625.98,1408.32 5594.7,1408.32 5538.94,1464.08 5538.94,1523.5 5533.6,1528.84 U26.12@5533.6,1547.24
USB3_P: J10.3 U26.13 | length 1048.3
  Top Layer w5.3: U26.13@5553.28,1547.24 5553.28,1528.84 5547.94,1523.5 5547.94,1467.81 5598.43,1417.32 5629.71,1417.32 5674.35,1372.68 5674.35,882.1 5531.5,739.24 5531.5,681.1 J10.3@5566.93,645.67
USB4_N: J10.6 U26.15 | length 1331.8
  Top Layer w5.3: J10.6@5488.19,543.31 5489.31,543.31 5521,575 5521,588.73 5532.27,600 5590,600 5611,621 5611,711 5790,890 5790,1496 5750,1536 5724,1536 5668.05,1591.95 5636.08,1591.95 5630.74,1586.61 U26.15@5612.34,1586.61
USB4_P: J10.7 U26.16 | length 1350.8
  Top Layer w5.3: J10.7@5566.93,543.31 5561.69,543.31 5530,575 5530,585 5536,591 5593.73,591 5620,617.27 5620,707.27 5799,886.27 5799,1499.73 5753.73,1545 5727.73,1545 5671.77,1600.95 5636.08,1600.95 5630.74,1606.3 U26.16@5612.34,1606.3
USB-H1-OC: M1.C57 R142.1 R143.1 | length 189.5
  Top Layer w4.7: v1(4525,3340) 4526.42,3338.58 M1.C57@4586.61,3338.58
  Bottom Layer w4.7: R142.1@4455.13,3265 R143.1@4455.13,3310 4490,3310 4520,3340 v1(4525,3340)
USB-H1-VBUS: C171.1 M1.C55 R144.1 | length 221.3
  Top Layer w10: v1(4525,3370) 4536.73,3358.27 M1.C55@4586.61,3358.27
  Bottom Layer w10: R144.1@4447.32,3368.39 4448.94,3370 v1(4525,3370)
  Bottom Layer w20: C171.1@4443.39,3443.19 4443.39,3411.61 4447.32,3407.68 R144.1@4447.32,3368.39
USB-HOST_N: M1.C58 U26.1 | length 2156.1
  Top Layer w5.3: M1.C58@4720.47,3338.58 4754.62,3338.58 4759.96,3333.24 4846.76,3333.24 5039,3141 5039,1808.73 5123.73,1724 5338.73,1724 5362.73,1700 5392.35,1700 5397.08,1704.73 U26.1@5415.48,1704.73
USB-HOST_P: M1.C60 U26.2 | length 2156.6
  Top Layer w5.3: M1.C60@4720.47,3318.9 4754.62,3318.9 4759.96,3324.24 4843.03,3324.24 5030,3137.27 5030,1805 5120,1715 5335,1715 5359,1691 5391.12,1691 5397.08,1685.04 U26.2@5415.48,1685.04
USB-HUB-AVDD: C163.2 C164.2 C165.2 C166.2 L22.2 U26.5 U26.9 U26.14 | length 1023.7
  Top Layer w12: v2@5349.41,1625 5349.72,1625.31 U26.5@5415.48,1625.31 ; C165.2@5429.32,1452.76 5460.63,1452.76 5474.54,1466.67 U26.9@5474.54,1547.24 ; U26.14@5572.97,1547.24 5572.97,1509.71 v2(5586.61,1496.06)
  Top Layer w20: C164.2@5309.87,1625 v2@5349.41,1625 ; v2(5345,1795) 5345,1848.11 5350.39,1853.5 5358.77,1845.13 C163.2@5405,1845.13 ; v2(5586.61,1496.06) 5632.68,1450 C166.2@5680.13,1450
  Bottom Layer w20: v2(5345,1795) 5350.39,1789.61 5350.39,1562.99 5417.32,1496.06 v2(5474.54,1496.06) v2(5586.61,1496.06)
  other v2: 5350,1625
USB-OTG-VBUS: M1.C45 Q8.3 | length 3466
  Top Layer w10: v1(4042,3455) 4041,3456 4586.61,3456 M1.C45@4586.61,3456.69
  Top Layer w20: v2(3560,1135) 3795,1135 3828,1102 Q8.3@3828,985
  Bottom Layer w20: v2(3560,1135) 3585,1160 3585,1965 4042,2422 v1(4042,3455)
USBH-SH-GND: J10.9 J10.10 J10.11 J10.12 L23.2
VADC1-INT: M1.B54 U17.38 | length 2810.2
  Top Layer w4.7: U17.38@920.47,3543.9 878.9,3543.9 845,3510 845,3445 845.3,3444.7 845.3,3429.7 910.3,3364.7 910.3,3345.98 955.98,3300.3 1055.98,3300.3 1186.28,3170 1530,3170 1555,3145 1615,3145 1835,2925 2490,2925 2515,2900 v1(2520,2900) ; M1.B54@2460.63,2295.28 2559.72,2295.28 v1(2565,2290)
  Bottom Layer w4.7: v1(2520,2900) 2565,2855 v1(2565,2290)
VADC1-RST: U17.31 U18.4 | length 92.9
  Top Layer w4.7: U18.4@835,3663.8 868.8,3663.8 886.69,3681.69 U17.31@920.47,3681.69
VADC1-X1: C96.2 R97.2 U17.13 Y2.3 | length 312.5
  Top Layer w4.7: U17.13@1156.69,3543.9 1186.1,3543.9 1265.13,3464.87 R97.2@1285,3464.87 1314.87,3464.87 1340.56,3490.56 Y2.3@1350.2,3490.56 1365.13,3505.49 C96.2@1365.13,3560
VADC1-X2: C97.2 R97.1 U17.12 Y2.1 | length 426.1
  Top Layer w4.7: U17.12@1156.69,3524.21 1185.79,3524.21 1230,3480 1230,3450 1255.13,3424.87 R97.1@1285,3424.87 1300.13,3440 1385,3440 Y2.1@1425,3400 1425,3360 1409.87,3344.87 C97.2@1409.87,3330
VADC2-INT: M1.B53 U19.38 | length 1856.5
  Top Layer w4.7: v1(830,2770) 830,2670 895,2605 915,2605 1050,2470 1095,2470 1160,2405 1850,2405 1959.72,2295.28 M1.B53@2326.77,2295.28 ; v1(885,2800) 890,2800 893.9,2803.9 U19.38@920.47,2803.9
  Bottom Layer w4.7: v1(830,2770) 850,2770 880,2800 v1(885,2800)
VADC2-RST: U19.31 U20.4 | length 96.6
  Top Layer w4.7: U20.4@833.66,2917.98 867.98,2917.98 891.69,2941.69 U19.31@920.47,2941.69
VADC2-X1: C127.2 R110.2 U19.13 Y3.3 | length 316.3
  Top Layer w4.7: U19.13@1156.69,2803.9 1196.1,2803.9 1250,2750 1250,2740 1265.13,2724.87 R110.2@1285,2724.87 1304.87,2724.87 1325.56,2745.56 Y3.3@1350.2,2745.56 1355,2750.36 1355,2785 1365.13,2795.13 C127.2@1365.13,2815
VADC2-X2: C126.2 R110.1 U19.12 Y3.1 | length 429.1
  Top Layer w4.7: U19.12@1156.69,2784.21 1195.79,2784.21 1235,2745 1235,2710 1260.13,2684.87 R110.1@1285,2684.87 1309.87,2684.87 1320,2695 1385,2695 Y3.1@1425,2655 1420,2650 1420,2615 1404.87,2599.87 C126.2@1404.87,2585
VBAT: C1.1 C2.1 C7.1 C8.1 C13.1 C14.1 C17.1 C18.1 D1.2 D5.2 R1.1 R4.2 U3.4 U6.4 U7.4 U8.4 | length 1203.7
  Top Layer w12: 6921.26,736.22 6937,751.96 U6.4@6972.44,751.96 ; 6921.26,2641.73 6948.81,2669.29 U8.4@6972.44,2669.29 ; 6923.23,2005.91 6948.81,2031.49 U3.4@6972.44,2031.49 ; 6925.2,1374.02 6944.88,1393.7 U7.4@6972.44,1393.7 ; R4.2@7012,1925.2 7012,1885.64 7035.43,1862.2 D1.2@7078.74,1862.2 v1(7141.73,1862.2)
  Top Layer w15: R1.1@6133.86,476.82 6133.86,500 6153.54,519.68 6692.91,519.68
  Bottom Layer w15: C17.1@6677.17,2559.06 6677.17,2597.17 v1(6685,2605)
  Bottom Layer w20: C7.1@6677.17,641.73 v2(6677.17,688.98) ; C13.1@6677.17,1283.46 6677.17,1318.9 v2(6677.17,1334.65) ; C1.1@6677.17,1921.26 v2(6677.17,1972.44)
  other v2: 6917.32,444.88 6960.63,444.88 7003.94,444.88 7047.24,444.88 7090.55,444.88 7133.86,444.88 6917.32,480.31 6960.63,480.31 7003.94,480.31 7047.24,480.31 7090.55,480.31 7133.86,480.31 6917.32,515.75 6960.63,515.75 7003.94,515.75 7047.24,515.75 7090.55,515.75 7133.86,515.75 6814.96,1212.6 6854.33,1212.6 6893.7,1212.6 6814.96,1251.97 6854.33,1251.97 6893.7,1251.97 6814.96,1291.34 6854.33,1291.34 6893.7,1291.34 6814.96,1330.71 6854.33,1330.71 6893.7,1330.71 6830.71,1858.27 6870.08,1858.27 6909.45,1858.27 6830.71,1897.64 6870.08,1897.64 6909.45,1897.64 6830.71,1937.01 6870.08,1937.01 6909.45,1937.01 6830.71,1976.38 6870.08,1976.38 6909.45,1976.38 6818.9,2500 6858.27,2500 6897.64,2500 6818.9,2539.37 6858.27,2539.37 6897.64,2539.37 6818.9,2582.68 6858.27,2582.68 6897.64,2582.68 6818.9,2625.98 6858.27,2625.98 6897.64,2625.98
VBUS1: C168.1 C169.1 J10.5 U25.8
VBUS2: C172.1 C173.1 J10.1 U25.5
VCOM: C61.1 M2.1 U15.1 U15.4 | length 1876.8
  Top Layer w10: v1(2330,4905) 2335.63,4899.37 M2.1@2371.14,4899.37
  Top Layer w12: v1(3750,4620) 3750.13,4619.87 C61.1@3750.13,4590 3780.13,4560 U15.1@3820,4560 3845,4560 3870,4535 3870,4515 3903.74,4481.26 U15.4@3938.11,4481.26
  Bottom Layer w12: v1(2330,4905) 3165,4905 3290,4780 3290,4745 3415,4620 v1(3750,4620)
VGH: C50.1 C51.1 M2.38 Q7.3 | length 490
  Top Layer w10: M2.38@3099.49,4899.37 3099.49,4949.49 v2(3100,4950)
  Top Layer w20: v2(3330,4950) 3331.5,4951.5 C50.1@3390,4951.5 C51.1@3465,4951.5 3491.5,4951.5 3500,4960 Q7.3@3535,4960
  Bottom Layer w20: v2(3100,4950) v2(3330,4950)
VGL: C48.2 M2.35 Q6.3 | length 829.8
  Top Layer w10: v2(3040,5010) 3040,4899.8 M2.35@3040.43,4899.37
  Top Layer w20: v2(3415,4775) 3416.5,4776.5 C48.2@3465,4776.5 3506.5,4776.5 3515,4785 Q6.3@3535,4785
  Bottom Layer w20: v2(3040,5010) 3375,5010 3425,4960 3425,4815 3415,4805 v2(3415,4775)
VGND1: C75.2 C76.2 C80.2 C81.2 C89.1 C91.1 J5.3 R88.1 R98.1 U17.21 U17.24 U17.28 | length 341.9
  Top Layer w10: U17.28@989.37,3711.22 989.37,3744.37 v1(990,3745) ; U17.24@1068.11,3711.22 1068.11,3748.11 v1(1075,3755) ; U17.21@1127.16,3711.22 1127.16,3737.16 1135,3745 v1(1140,3745)
  Top Layer w12: v1(415,3510) R88.1@415,3544.87 ; C80.2@900,3844.87 C81.2@945,3844.87 v1(945,3915)
  Bottom Layer w10: v1(910,3720) C75.2@940.13,3720 ; C89.1@1065.13,3720 1075,3729.87 v1(1075,3755)
  other v1: 1035,3890 1065,3890 970,3915 995,3915 1065,3915
VGND2: C105.2 C106.2 C110.2 C111.2 C119.1 C121.1 J6.3 R101.1 R111.1 U19.21 U19.24 U19.28 | length 335
  Top Layer w10: U19.28@989.37,2971.22 989.37,2999.37 v1(990,3000) ; U19.24@1068.11,2971.22 1068.11,3003.11 v1(1075,3010) ; U19.21@1127.16,2971.22 1127.16,2997.16 1140,3010 v1(1145,3010)
  Top Layer w12: R101.1@414.02,2803.38 414.02,2770.98 v1(415,2770)
  Top Layer w15: C111.2@905,3099.87 C110.2@950,3099.87 950,3125 940,3135 v1(940,3160)
  Bottom Layer w10: v1(905,2975) C105.2@940.13,2975 ; C119.1@1070.13,2975 1070.13,3005.13 v1(1075,3010)
  other v1: 1030,3135 1055,3135 965,3160 990,3160 1055,3160
VPLLGND1: C73.2 C74.2 C88.1 C90.1 R99.1
VPLLGND2: C103.2 C104.2 C118.1 C120.1 R112.1 | length 7.4
  Bottom Layer w20: C103.2@1249.87,2950 C103.2@1250.13,2949.75 ; C104.2@1295.87,3015 C104.2@1300.87,3010
WIFI-PWR: C190.1 C191.1 C192.1 U31.1 U32.2 U32.3 | length 34.8
  Bottom Layer w4.7: v1(4740,860) 4740,855.25 4740.13,855.13 C190.1@4740.13,885
WIFI-PWREN: M1.A22 R180.2 U32.5 | length 4703.2
  Top Layer w4.7: M1.A22@2460.63,3574.8 2784.8,3574.8 v1(2785,3575) ; v1(3550,1190) v1(3690,1190) ; R180.2@4730,1030.13 4730,995 v1@4739.37,985.63 ; U32.5@4739.37,943.11 v1@4739.37,980
  Bottom Layer w4.7: v1(2785,3575) 2780,3570 2780,1450 2945,1285 3475,1285 3550,1210 v1(3550,1190) ; v1(3690,1190) 3900,980 v1(4740,980)
pads on no net: Designator7. Designator8. Designator9. Designator10. Designator11. Designator12. J1.1 J12.5 J13.6 J13.11 J13.13 J13.16 J13.17 J13.19 J13.23 J13.25 J13.28 J13.30 J13.31 J13.32 J13.33 J13.44 J13.45 J13.46 J13.47 J13.48 J13.49 J13.51 J17.8 J17.10 M1.A14 M1.A15 M1.A28 M1.A30 M1.A46 M1.A54 M1.B1 M1.B3 M1.B5 M1.B6 M1.B7 M1.B8 M1.B9 M1.B10 M1.B11 M1.B12 M1.B13 M1.B14 M1.B15 M1.B16 M1.B17 M1.B18 M1.B19 M1.B20 M1.B21 M1.B22 M1.B24 M1.B26 M1.B28 M1.C1 M1.C3 M1.C5 M1.C7 M1.C9 M1.C11 M1.C13 M1.C15 M1.C17 M1.C19 M1.C21 M1.C23 M1.C25 M1.C26 M1.C27 M1.C29 M1.C31 M1.C33 M1.C35 M1.C40 M1.C42 M1.C44 M1.C46 M1.C48 M1.C50 M1.C59 M1.D34 M1.D35 M1.D36 M1.D37 M1.D38 M1.D39 M1.D40 M1.D42 M1.D44 M1.D46 M1.D48 M1.D49 M2.4 M2.23 M2.24 M2.26 M2.27 U3.7 U5.1 U6.7 U7.7 U8.7 U11.22 U11.42 U11.43 U11.45 U11.46 U14.3 U17.2 U19.2 U22.A4 U22.D5 U22.E3 U22.E4 U22.E5 U22.E6 U22.E7 U22.F4 U22.F5 U22.F6 U22.F7 U22.G1 U22.G6 U24.A4 U24.C4 U24.D4 U24.D5 U24.E3 U24.E4 U24.E5 U24.E6 U24.E7 U24.F4 U24.F5 U24.F6 U24.F7 U24.G1 U24.G6 U25.2 U25.3 U26.18 U26.19 U26.20 U26.24 U26.26 U26.27 U27.2 U27.8 U30.1 U30.2 U30.3 U30.4 U30.5 U30.6 U30.16 U30.17 U30.18 U30.19 U30.22 Y1.2 Y1.4 Y2.2 Y2.4 Y3.2 Y3.4 Y4.2 Y4.4

## Polygon pours and split planes (outlines as drawn)
GND on Top Layer "Top Layer-No Net" (solid, remove dead copper, pour order 88): 4475,90 4645,90 4645,10 4475,10
GND on Top Layer "Top Layer-No Net" (solid, remove dead copper, pour order 86): 69 vertices, not listed, extent 4030,10 5150,1155
GND on Top Layer "Top Layer-No Net" (solid, remove dead copper, pour order 84): 38 vertices, not listed, extent 5900,4360 6785,4880
GND on Top Layer "Top Layer-No Net" (solid, remove dead copper, pour order 82): 3740,4930 3785,4930 3785,4990 3825,5030 3835,5040 3865,5070 3865,5075 3600,5075 3600,5040 3655,5040 3685,5010 3715,5010 3730,4995 3730,4930
GND on Top Layer "Top Layer-No Net" (solid, remove dead copper, pour order 78): 88 vertices, not listed, extent 3245,3080 7460,5105
GND on Top Layer "Top Layer-No Net" (solid, remove dead copper, pour order 76): 30 vertices, not listed, extent 7070,20 7460,3095
GND on Top Layer "Top Layer-No Net" (solid, remove dead copper, pour order 94): 1440,5090 1545,5090 1545,4950 1430,4950 1430,5090
GND on Top Layer "Top Layer-No Net" (solid, remove dead copper, pour order 91): 1755,5090 1835,5090 1835,4950 1720,4950 1720,5090
GND on Top Layer "Top Layer-No Net" (solid, remove dead copper, pour order 88): 2215,5105 2395,5105 2395,4950 2185,4950 2185,5105
P3V3 on Top Layer "Top Layer-No Net" (solid, remove dead copper, pour order 102): 19 vertices, not listed, extent 4870,4710 5085,4850
LCD-3V3 on Top Layer "Top Layer-No Net" (solid, remove dead copper, pour order 99): 4750,4890 4830,4890 4830,4700 4670,4700 4670,4855 4670,4870 4685,4870 4720,4870 4730,4870
P1V8 on Top Layer "Top Layer-No Net" (solid, remove dead copper, pour order 95): 19 vertices, not listed, extent 1810,1470 2010,1905
P3V3 on Top Layer "Top Layer-No Net" (solid, remove dead copper, pour order 92): 1045,4400 1075,4400 1095,4400 1095,4485 1090,4490 1020,4490 1015,4485 1015,4410 1015,4405 1020,4400
GPS-PWR on Top Layer "Top Layer-No Net" (solid, remove dead copper, pour order 89): 20 vertices, not listed, extent 915,4515 1135,4725
P3V3 on Top Layer "Top Layer-No Net" (solid, remove dead copper, pour order 108): 4775,915 4795,915 4810,915 4820,925 4820,1025 4810,1035 4770,1035 4760,1025 4760,960 4760,925 4770,915
WIFI-PWR on Top Layer "Top Layer-No Net" (solid, remove dead copper, pour order 96): 4735,870 4940,870 4955,855 4955,645 4945,635 4820,635 4810,645 4810,765 4800,775 4770,775 4735,775 4725,785 4725,860
GND on Top Layer "Top Layer-No Net" (solid, remove dead copper, pour order 85): 6945,4530 7040,4530 7050,4540 7050,4630 7040,4640 6900,4640 6890,4630 6890,4540 6900,4530
ETH-SH-GND on Top Layer "Top Layer-No Net" (solid, remove dead copper, pour order 76): 6880,3715 6935,3715 6955,3735 6955,4370 7050,4465 7050,4495 7050,4500 7040,4510 6910,4510 6890,4490 6845,4445 6845,4390 6845,3730 6860,3715
GND on Top Layer "Top Layer-No Net" (solid, remove dead copper, pour order 135): 6401.57,2618.11 6625.98,2618.11 6625.98,2440.94 6452.76,2440.94 6401.57,2440.94
GND on Top Layer "Top Layer-No Net" (solid, remove dead copper, pour order 133): 7098.43,2980.32 7303.15,2980.32 7303.15,2826.77 7098.43,2826.77
12V-CAM on Top Layer "Top Layer-No Net" (solid, remove dead copper, pour order 132): 6980.32,2720.47 6996.06,2720.47 6996.06,2775.59 7070.87,2775.59 7070.87,2988.19 7070.87,3055.12 6988.19,3055.12 6897.64,3055.12 6897.64,2929.13 6897.64,2846.46 6944.88,2799.21 6948.82,2795.28 6948.82,2720.47
12V-CAM on Top Layer "Top Layer-No Net" (solid, remove dead copper, pour order 131): 6492.13,2759.84 6578.74,2759.84 6578.74,3055.12 6401.57,3055.12 6401.57,2759.84
NetC19_1 on Top Layer "Top Layer-No Net" (solid, remove dead copper, pour order 128): 6921.26,2685.04 6622.05,2685.04 6622.05,2925.2 6826.77,2925.2 6826.77,2755.91 6921.26,2755.91
VBAT on Top Layer "Top Layer-No Net" (solid, remove dead copper, pour order 126): 6661.42,2440.94 6937.01,2440.94 6937.01,2570.87 6937.01,2661.42 6661.42,2661.42
GND on Top Layer "Top Layer-No Net" (solid, remove dead copper, pour order 125): 7098.43,2283.46 7255.91,2283.46 7255.91,2177.17 7078.74,2177.17 7078.74,2283.46
CPU-3V3 on Top Layer "Top Layer-No Net" (solid, remove dead copper, pour order 124): 6968.5,2082.68 6996.06,2082.68 6996.06,2137.8 7047.24,2137.8 7047.24,2413.39 6897.64,2413.39 6897.64,2192.91 6944.88,2145.67 6944.88,2082.68
GND on Top Layer "Top Layer-No Net" (solid, remove dead copper, pour order 122): 6405.51,1984.25 6622.05,1984.25 6622.05,1807.09 6405.51,1807.09
CPU-3V3 on Top Layer "Top Layer-No Net" (solid, remove dead copper, pour order 118): 6464.57,2106.3 6578.74,2106.3 6578.74,2413.39 6405.51,2413.39 6405.51,2106.3
NetC3_1 on Top Layer "Top Layer-No Net" (solid, remove dead copper, pour order 116): 6885.83,2047.24 6917.32,2047.24 6917.32,2118.11 6826.77,2118.11 6826.77,2287.4 6622.05,2287.4 6622.05,2185.04 6622.05,2047.24
VBAT on Top Layer "Top Layer-No Net" (solid, remove dead copper, pour order 115): 6653.54,1807.09 6937.01,1807.09 6937.01,1972.44 6937.01,2023.62 6720.47,2023.62 6653.54,2023.62
GND on Top Layer "Top Layer-No Net" (solid, remove dead copper, pour order 114): 7122.05,1653.54 7255.91,1653.54 7255.91,1535.43 7074.8,1535.43 7074.8,1653.54
P3V3 on Top Layer "Top Layer-No Net" (solid, remove dead copper, pour order 113): 6960.63,1444.88 6996.06,1444.88 6996.06,1503.94 7015.75,1503.94 7043.31,1503.94 7043.31,1759.84 6877.95,1759.84 6877.95,1653.54 6877.95,1582.68 6940.94,1519.68 6944.88,1515.75 6944.88,1460.63 6944.88,1444.88
VBAT on Top Layer "Top Layer-No Net" (solid, remove dead copper, pour order 112): 6653.54,1181.1 6653.54,1385.83 6842.52,1385.83 6937.01,1385.83 6937.01,1181.1
P5V0 on Top Layer "Top Layer-No Net" (solid, remove dead copper, pour order 111): 6972.44,803.15 6996.06,803.15 6996.06,858.27 7047.24,858.27 7047.24,1102.36 7047.24,1118.11 6897.64,1118.11 6897.64,972.44 6897.64,913.39 6937.01,874.02 6937.01,803.15
GND on Top Layer "Top Layer-No Net" (solid, remove dead copper, pour order 110): 6429.13,704.72 6625.98,704.72 6625.98,586.61 6625.98,555.12 6429.13,555.12
P5V0 on Top Layer "Top Layer-No Net" (solid, remove dead copper, pour order 106): 6405.51,1118.11 6590.55,1118.11 6590.55,842.52 6405.51,842.52 6405.51,1066.93
NetC9_1 on Top Layer "Top Layer-No Net" (solid, remove dead copper, pour order 100): 6897.64,767.72 6696.85,767.72 6633.86,767.72 6633.86,1007.87 6826.77,1007.87 6826.77,838.58 6909.45,838.58 6909.45,767.72
VBAT on Top Layer "Top Layer-No Net" (solid, remove dead copper, pour order 86): 7035.43,275.59 6917.32,275.59 6917.32,413.39 6657.48,413.39 6657.48,740.16 6933.07,740.16 6933.07,535.43 7157.48,535.43 7157.48,275.59
NetD5_1 on Top Layer "Top Layer-No Net" (solid, remove dead copper, pour order 75): 6661.42,377.95 6874.02,377.95 6874.02,196.85 7157.48,196.85 7157.48,19.68 6763.78,19.68 6763.78,236.22 6637.8,236.22 6637.8,377.95
NetC15_1 on Top Layer "Top Layer-No Net" (solid, remove dead copper, pour order 77): 6881.89,1409.45 6795.28,1409.45 6624.02,1409.45 6624.02,1588.58 6624.02,1661.42 6799.21,1661.42 6826.77,1661.42 6826.77,1476.38 6913.39,1476.38 6913.39,1409.45
GND on Top Layer "Top Layer-No Net" (solid, remove dead copper, pour order 93): 7114.17,1011.81 7251.97,1011.81 7251.97,897.64 7078.74,897.64 7078.74,1011.81
P3V3 on Top Layer "Top Layer-No Net" (solid, remove dead copper, pour order 104): 6421.26,1476.38 6578.74,1476.38 6578.74,1523.62 6578.74,1712.6 6578.74,1748.03 6405.51,1748.03 6405.51,1476.38
GND on Top Layer "Top Layer-No Net" (solid, remove dead copper, pour order 109): 6421.26,1338.58 6622.05,1338.58 6622.05,1185.04 6622.05,1181.1 6405.51,1181.1 6405.51,1303.15 6405.51,1338.58
USBH-SH-GND on Top Layer "Top Layer-No Net" (solid, remove dead copper, pour order 127): 21 vertices, not listed, extent 5177.17,11.81 5877.95,748.03
GND on Top Layer "Top Layer-No Net" (solid, remove dead copper, pour order 130): 30 vertices, not listed, extent 5909.45,11.81 6185.04,405.51
OTGVBUS on Top Layer "Top Layer-No Net" (solid, remove dead copper, pour order 136): 3955,290 3965,290 3965,460 3935,490 3935,525 3935,625 3925,635 3825,635 3825,450 3825,430 3845,430 3890,430 3905,430 3925,410 3925,290
GND on Top Layer "Top Layer-No Net" (solid, remove dead copper, pour order 82): 20 vertices, not listed, extent 3545,15 3815,575
OTG-SH-GND on Top Layer "Top Layer-No Net" (solid, remove dead copper, pour order 90): 19 vertices, not listed, extent 3745,15 4310,410
P3V3 on Top Layer "Top Layer-No Net" (solid, remove dead copper, pour order 97): 1995,1660 2075,1660 2120,1660 2130,1650 2130,1520 2130,1500 2120,1490 1990,1490 1965,1515 1965,1640 1965,1650 1975,1660
GND on Top Layer "Top Layer-No Net" (solid, remove dead copper, pour order 103): 1745,1675 1820,1675 1840,1675 1850,1665 1850,1565 1850,1560 1840,1550 1735,1550 1730,1550 1720,1560 1720,1620 1720,1665 1730,1675
LCD-3V3 on Top Layer "Top Layer-No Net" (solid, remove dead copper, pour order 137): 18 vertices, not listed, extent 4100,4600 4520,4765
SW on Top Layer "Top Layer-No Net" (solid, remove dead copper, pour order 138): 4345,4775 4265,4775 4250,4760 4115,4760 4115,4830 4115,4920 4220,4920 4220,4830 4345,4830
AVDD on Top Layer "Top Layer-No Net" (solid, remove dead copper, pour order 139): 4275,4920 4375,4920 4565,4920 4585,4920 4585,4830 4585,4790 4555,4790 4550,4790 4535,4805 4435,4805 4360,4805 4360,4845 4255,4845 4255,4920
SW on Top Layer "Top Layer-No Net" (solid, remove dead copper, pour order 140): 4115,4760 4030,4760 4030,4795 4030,4815 4125,4815 4125,4760
GND on Top Layer "Top Layer-No Net" (solid, remove dead copper, pour order 141): 4380,4935 4500,4935 4540,4935 4540,5015 4540,5040 4340,5040 4340,4935
GND on Top Layer "Top Layer-No Net" (solid, remove dead copper, pour order 142): 4100,4585 4225,4585 4260,4585 4260,4495 4100,4495
LCD-3V3 on Top Layer "Top Layer-No Net" (solid, remove dead copper, pour order 143): 3080,4440 3140,4440 3465,4440 3465,4280 3050,4280 3050,4400 3050,4440
NetD19_1 on Top Layer "Top Layer-No Net" (solid, remove dead copper, pour order 144): 3110,4490 3400,4490 3400,4575 3385,4575 3260,4575 3260,4585 3260,4650 3155,4650 3155,4535 3075,4535 3075,4490
GND on Top Layer "Top Layer-No Net" (solid, remove dead copper, pour order 145): 3175,5105 3310,5105 3310,4950 3130,4950 3130,5105
BL-LED- on Top Layer "Top Layer-No Net" (solid, remove dead copper, pour order 146): 2960,4930 2985,4930 2985,4815 2960,4815 2955,4815 2955,4930
BL-LED+ on Top Layer "Top Layer-No Net" (solid, remove dead copper, pour order 147): 3120,4930 3190,4930 3190,4860 3115,4860 3115,4930
LCD-3V3 on Top Layer "Top Layer-No Net" (solid, remove dead copper, pour order 148): 2385,4930 2415,4930 2415,4860 2415,4835 2390,4810 2390,4775 2325,4775 2315,4785 2315,4820 2315,4825 2330,4840 2335,4845 2360,4845 2365,4845 2385,4865
VGND1 on Bottom Layer "Top Layer-No Net" (solid, remove dead copper, pour order 84): 1020,3795 1070,3795 1085,3810 1085,3830 1085,3930 1080,3935 935,3935 930,3930 930,3830 1000,3830 1000,3815 1000,3800 1005,3795
VPLLGND1 on Bottom Layer "Top Layer-No Net" (solid, remove dead copper, pour order 81): 24 vertices, not listed, extent 1135,3585 1370,3785
VPLLGND2 on Bottom Layer "Top Layer-No Net" (solid, remove dead copper, pour order 78): 24 vertices, not listed, extent 1140,2850 1370,3050
GND on Bottom Layer "Top Layer-No Net" (solid, remove dead copper, pour order 134): 6429.13,2913.39 6582.68,2913.39 6582.68,2625.98 6401.57,2625.98 6401.57,2909.45 6401.57,2913.39
NetC19_1 on Bottom Layer "Top Layer-No Net" (solid, remove dead copper, pour order 129): 6649.61,2925.2 6838.58,2925.2 6838.58,2685.04 6622.05,2685.04 6622.05,2925.2